# Altium PCB Sonar_board.PcbDoc (part 1 of 2)
Units mm, origin at the board's own origin, x right, y up, seen from the top; angles counter-clockwise.
Board outline 152.4 x 101.6 mm, 4 copper layers (Top Layer, Ground Plane, Power Plane, Bottom Layer), stack 0.462 mm thick; 156 components, 157 nets, 762 pads, 215 vias.
Unrouted connection lines stored in the file: 227.
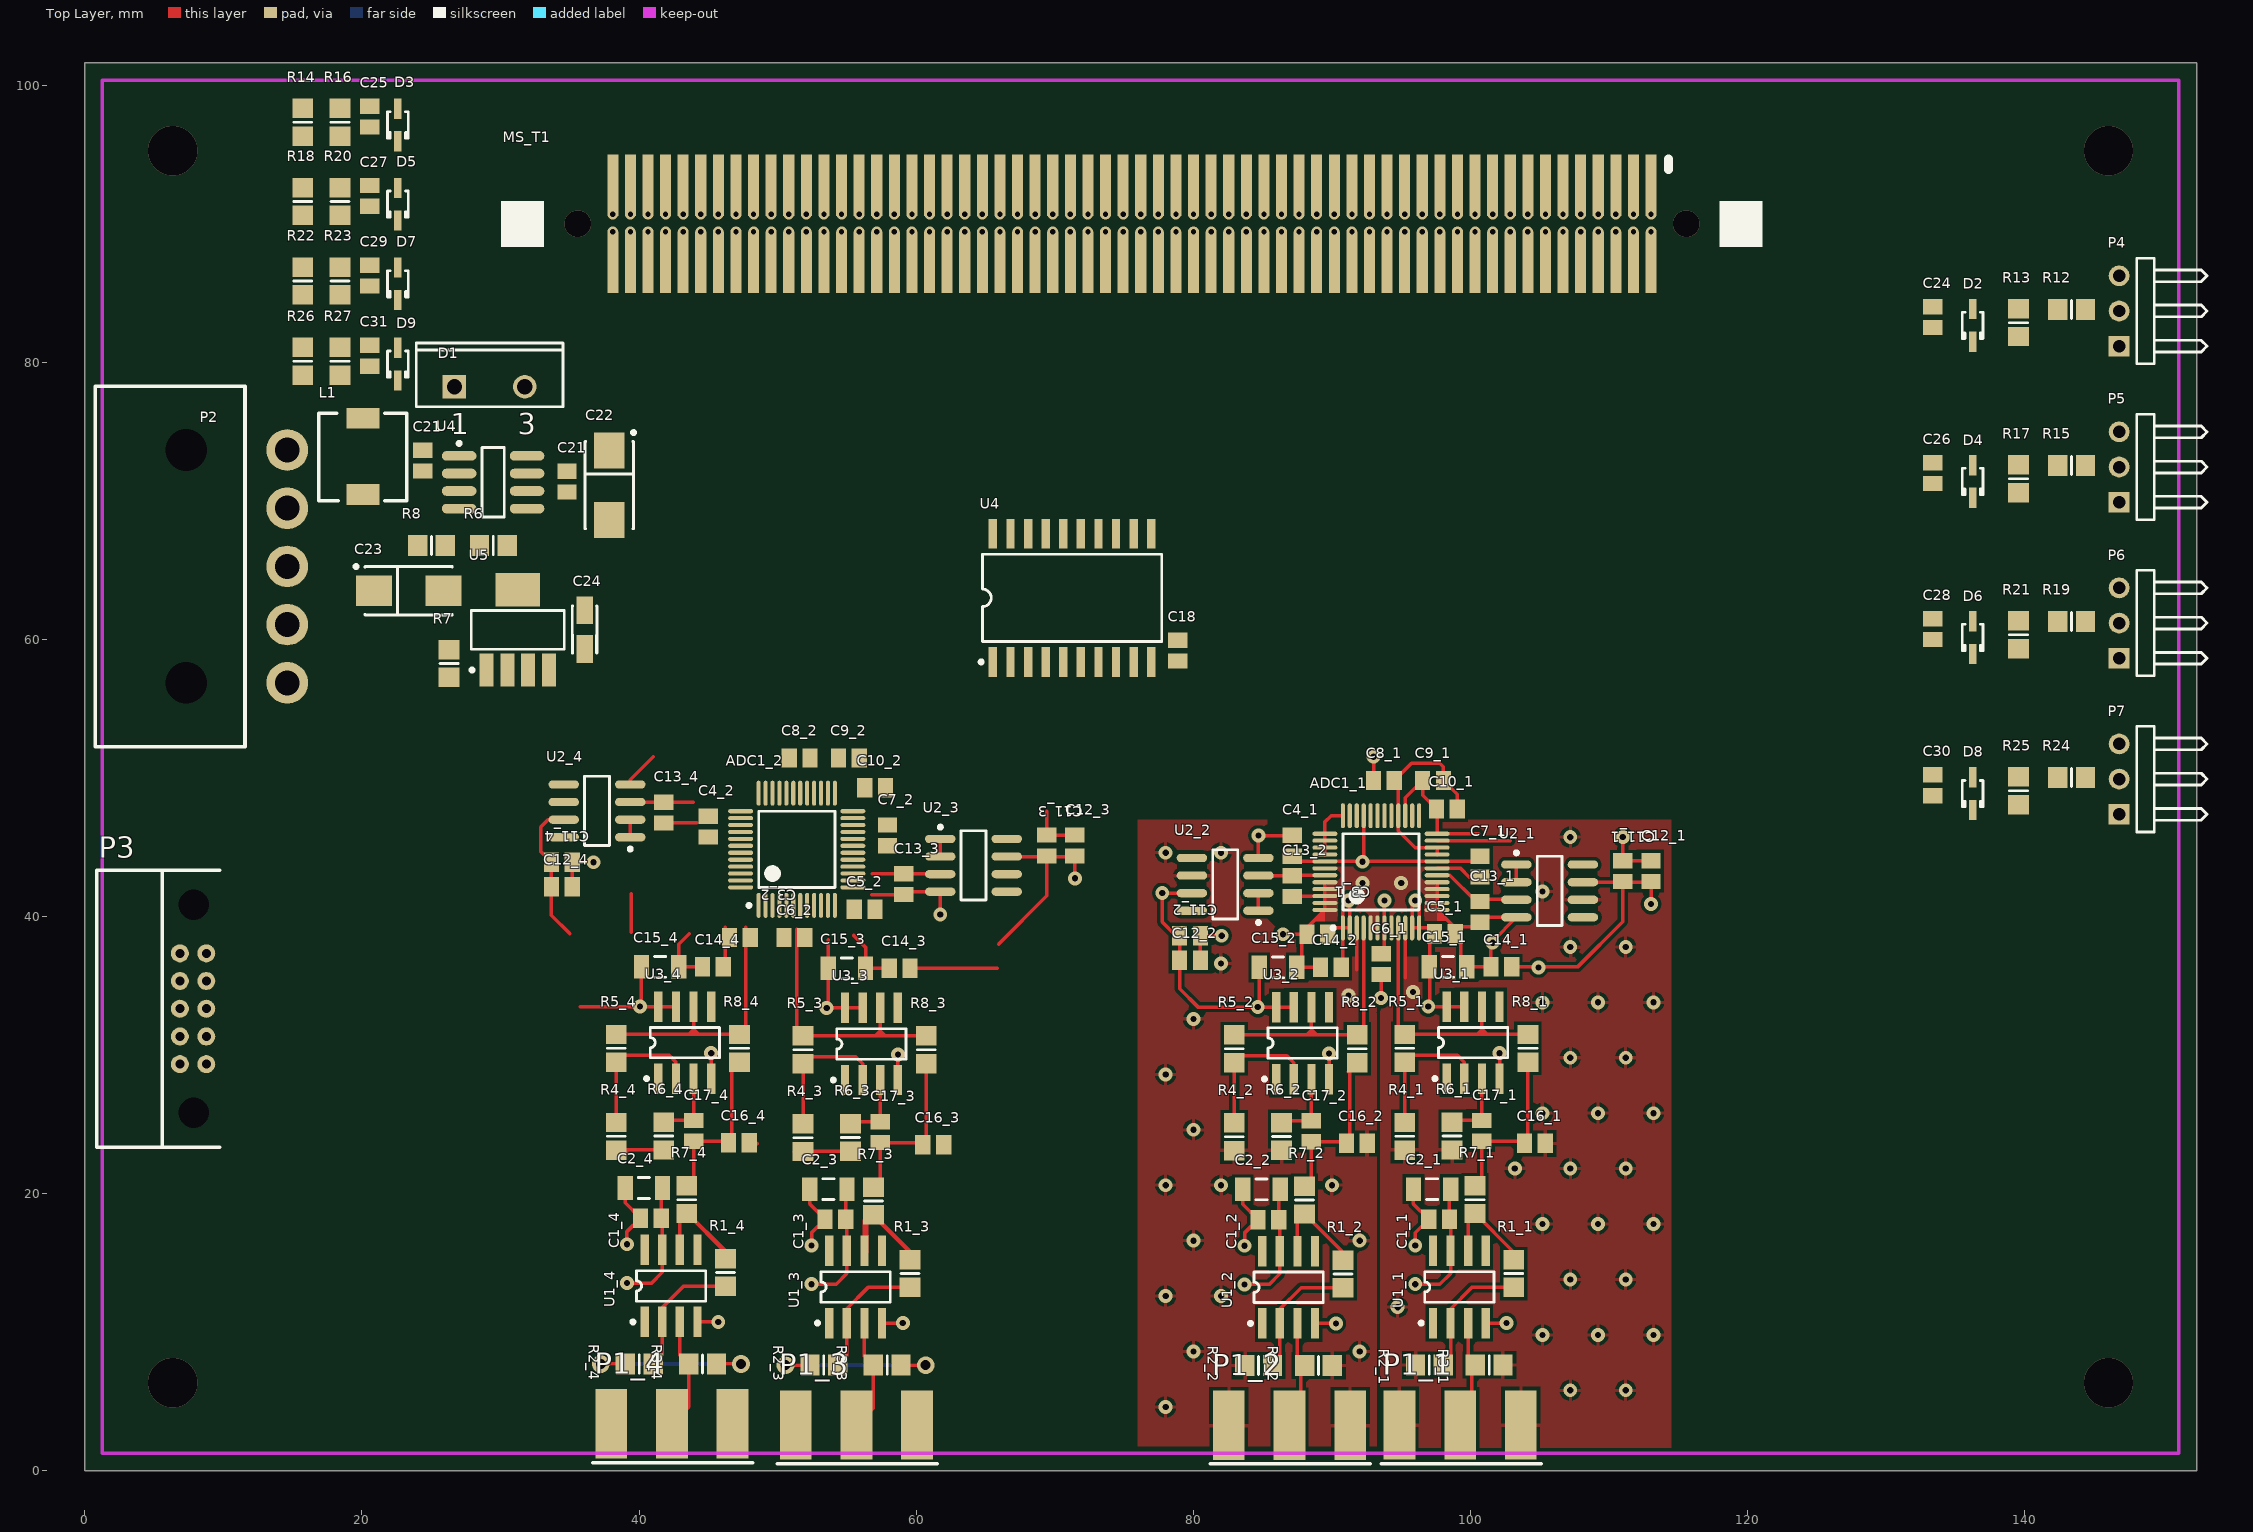
[diagram p0: Top Layer view]
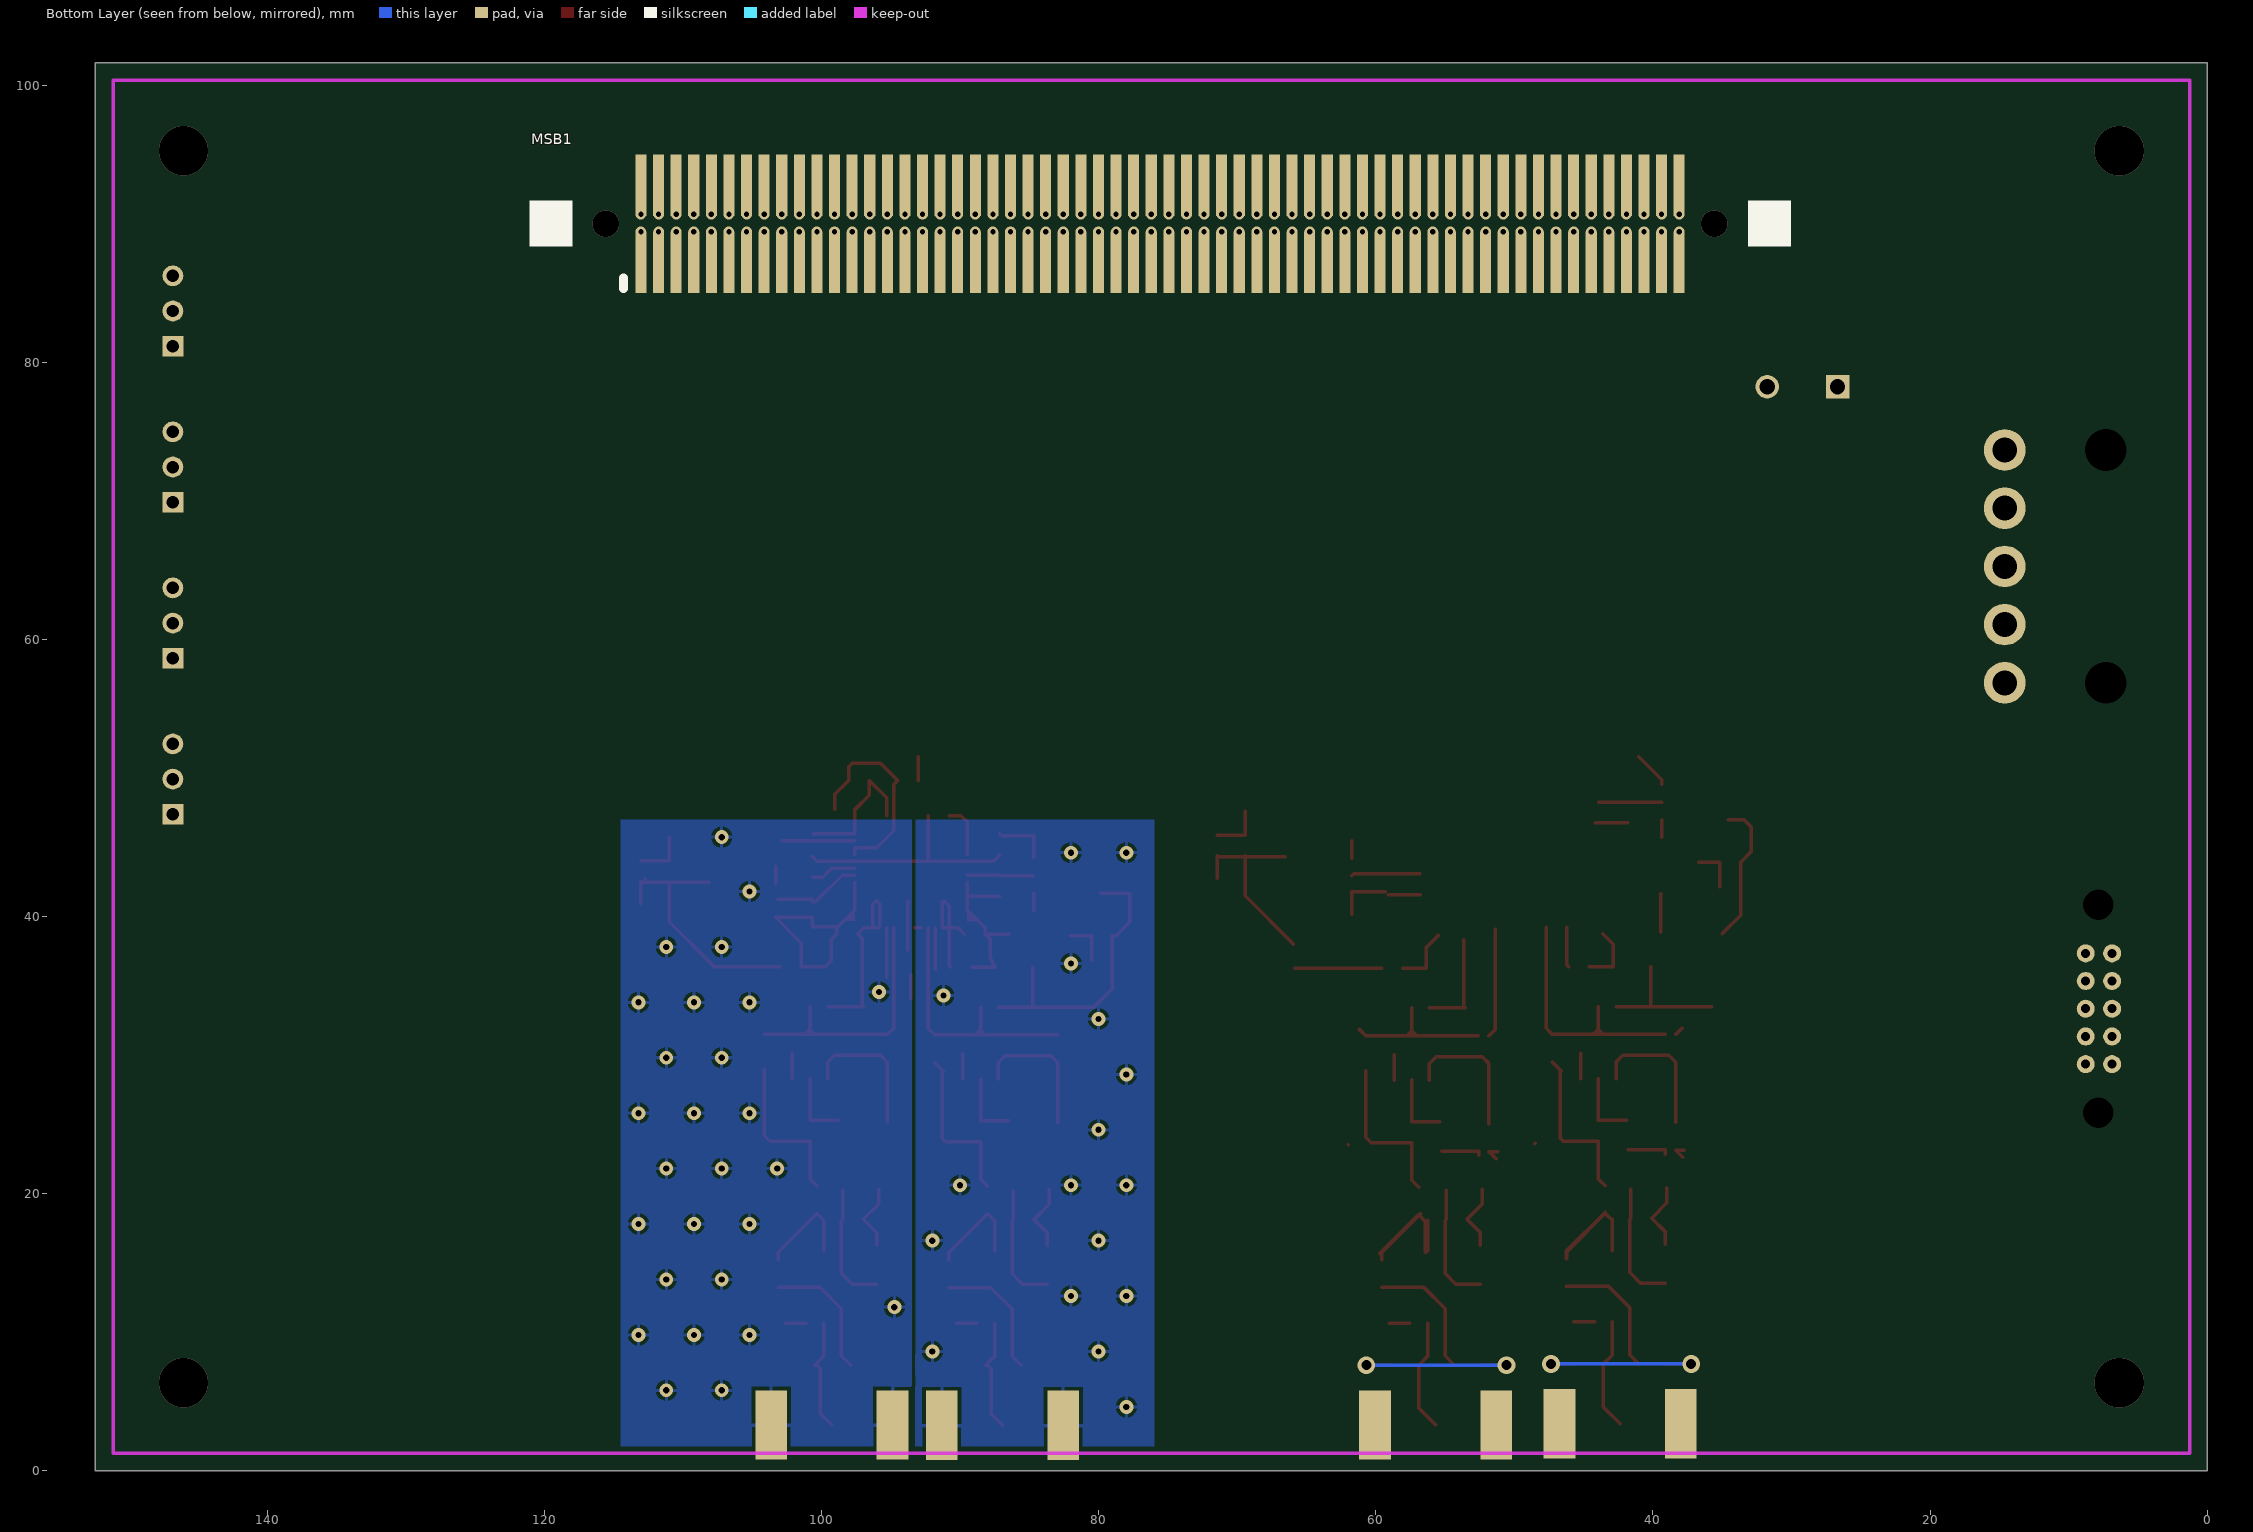
[diagram p1: Bottom Layer view, seen from below]
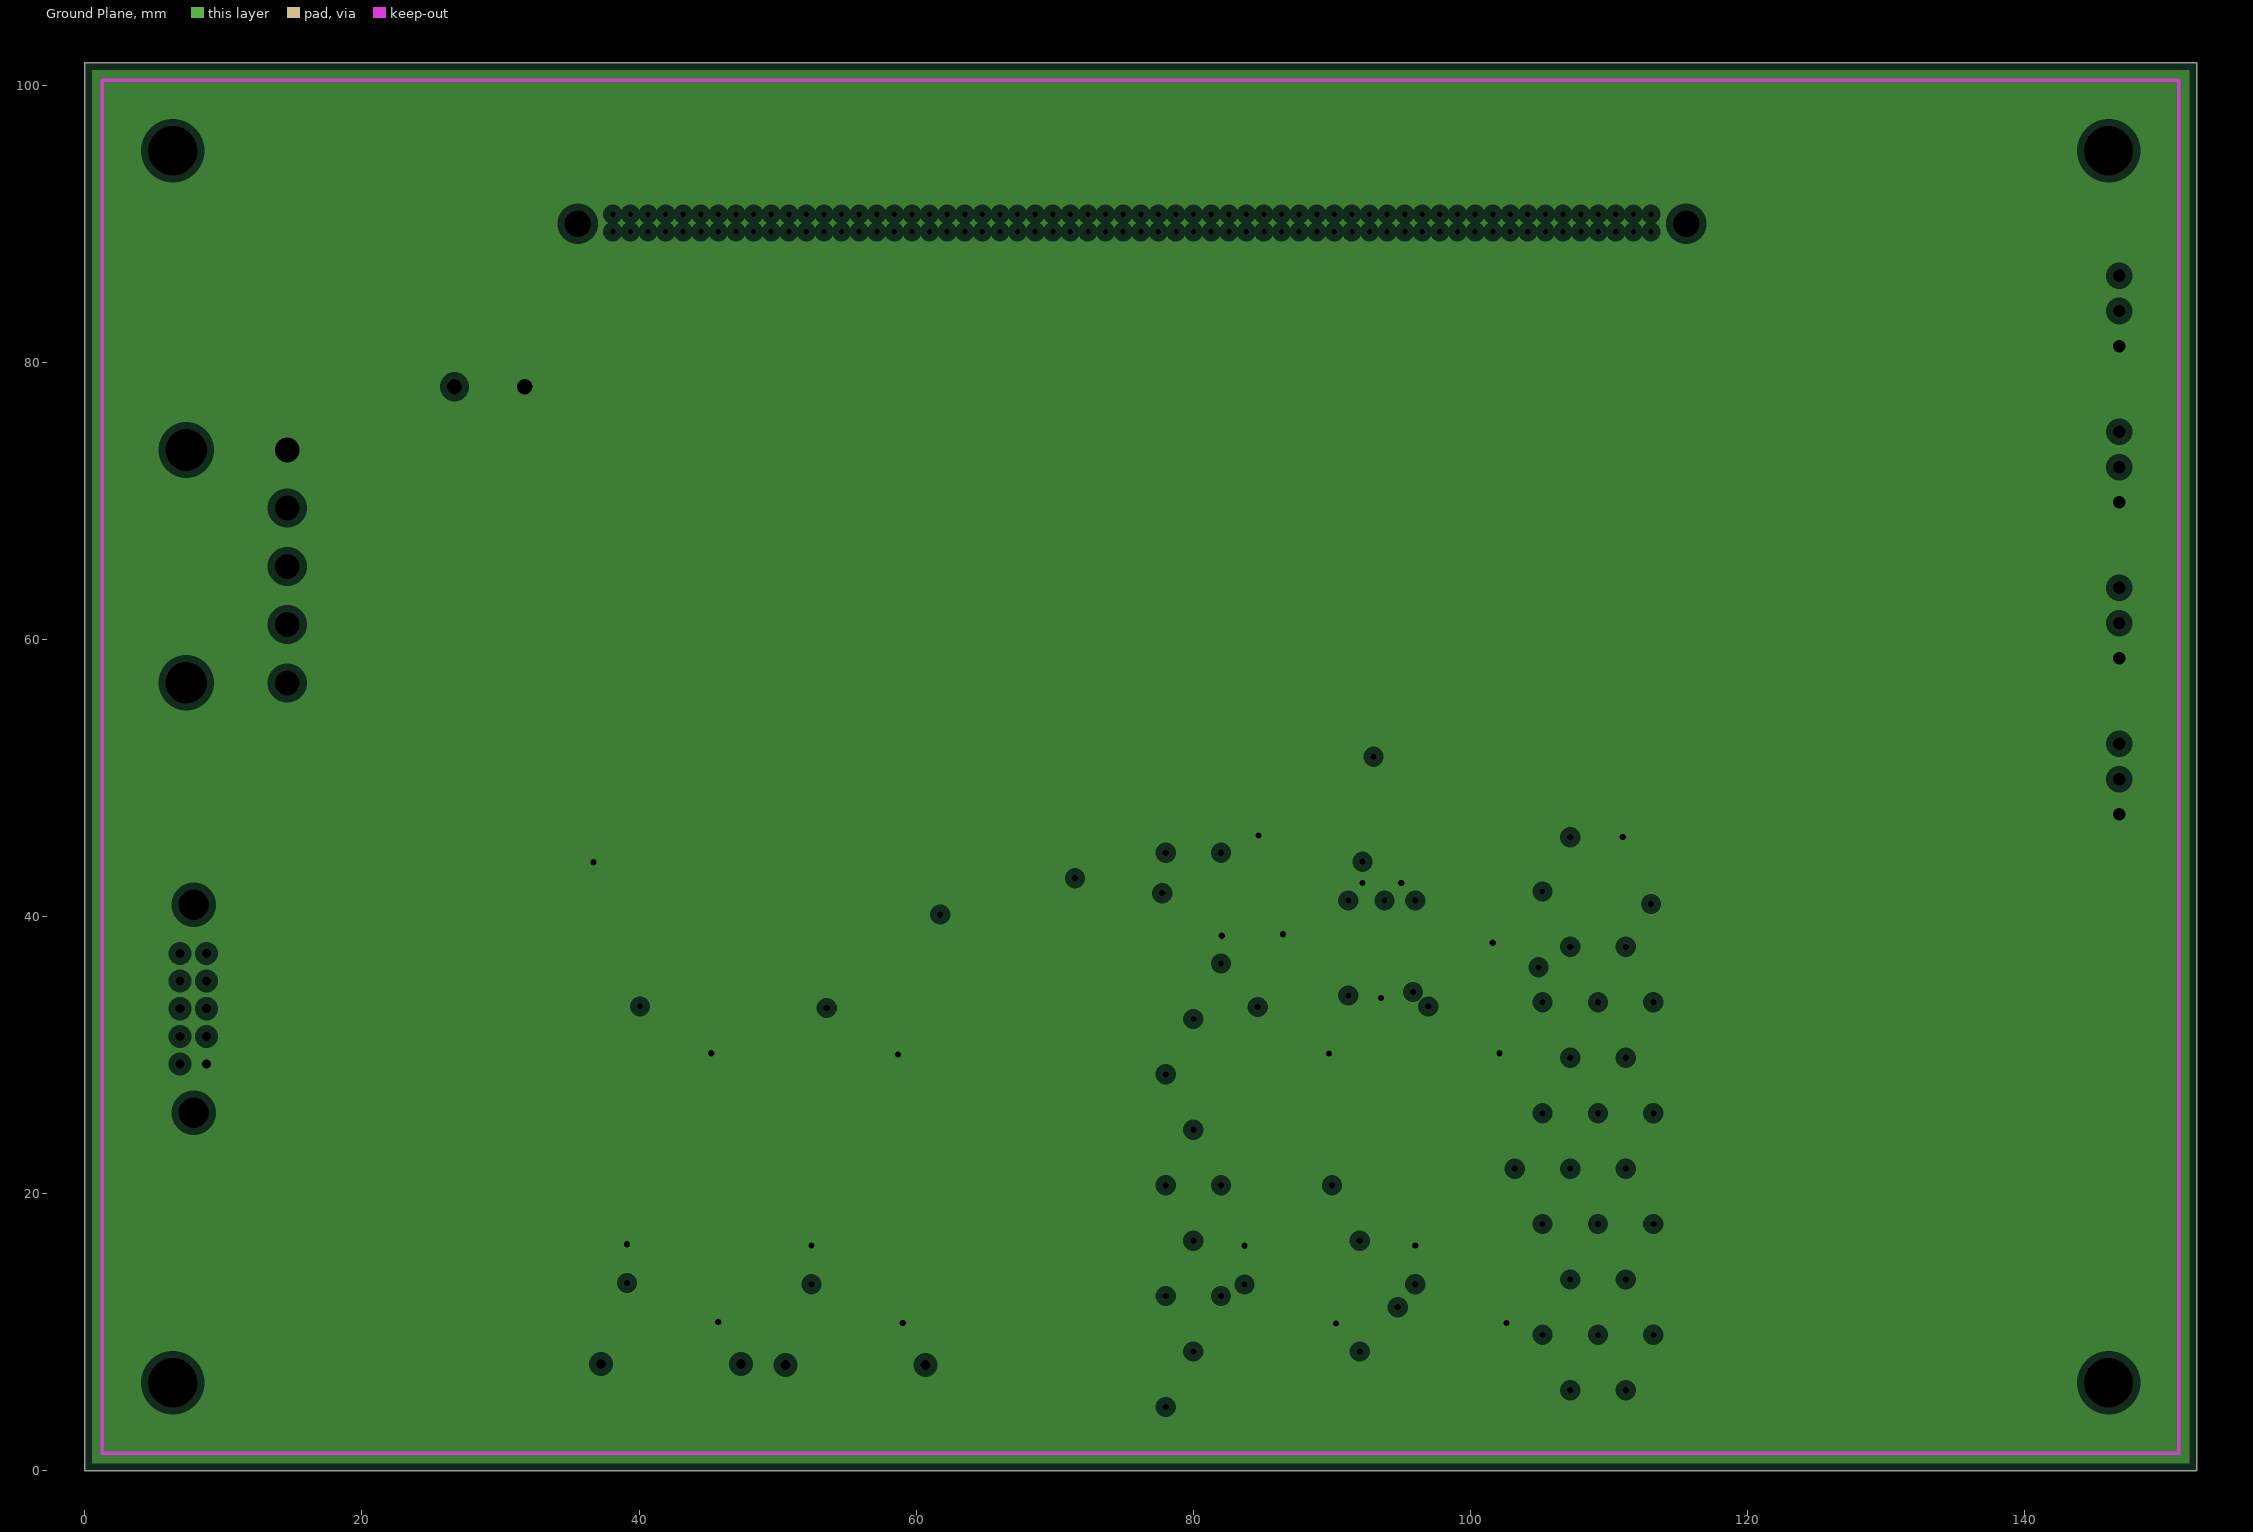
[diagram p2: Ground Plane, clearances drawn from the general rule]
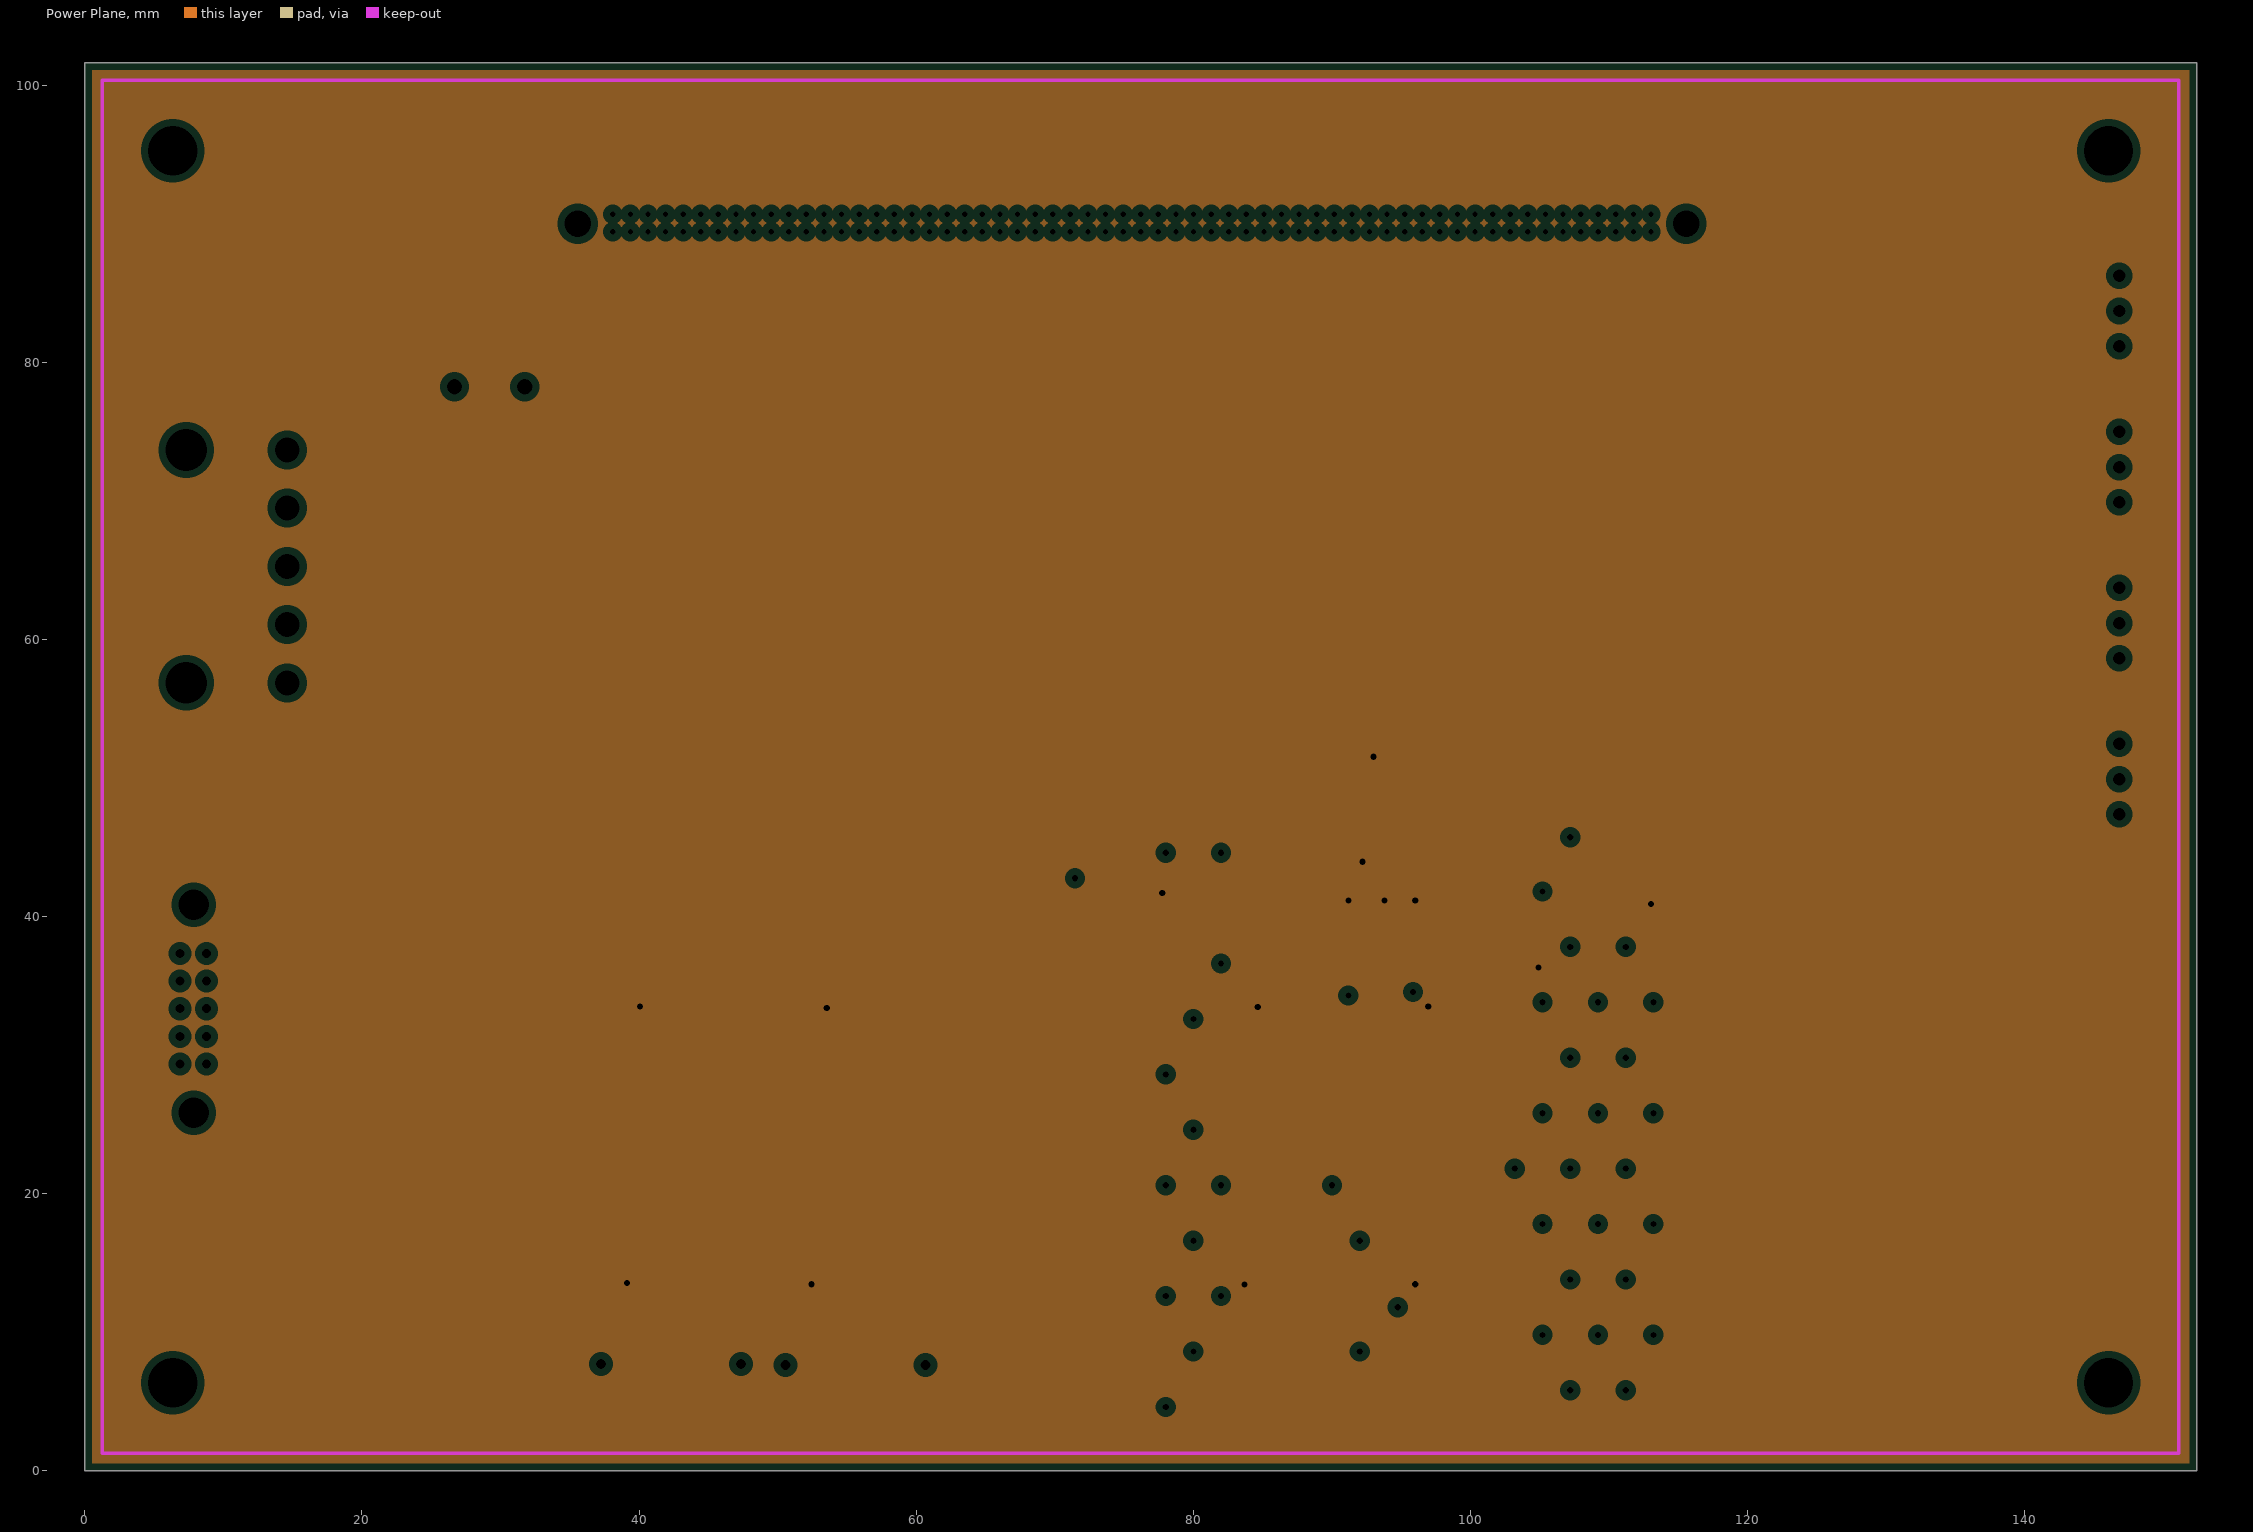
[diagram p3: Power Plane, clearances drawn from the general rule]

## Layer stack, top to bottom
Top Solder: solder mask 0.0102, Solder Resist, Dk 3.5
Top Layer: signal copper 0.0356
Ground Plane: plane copper 0.0356, net GND
Power Plane: plane copper 0.0356, net VCC
Dielectric3: core 0.32, FR-4, Dk 4.8
Bottom Layer: signal copper 0.0356
Bottom Solder: solder mask 0.0102, Solder Resist, Dk 3.5

## Board outline
0,0 152.4,0 152.4,101.6 0,101.6

## Design rules (kind name [scope] priority, off if disabled: settings)
Clearance Clearance_2 [InNamedPolygon('Vref_2')] p1: gap=0.254
Clearance Clearance_1 [InNamedPolygon('ADC_AGND')] p2: gap=0.254
Clearance [Not ((InComponent('ADC1_1') and isPad) or (InComponent('ADC1_2') and isPad)) vs Not ((InComponent('ADC1_1') and isPad) or (InComponent('ADC1_2') and isPad))] p3: gap=0.254
PlaneClearance [All] p1: clearance=0.508
PlaneConnect [All] p1: planeconnectstyle=Relief reliefexpansion=0.508 reliefentries=4 reliefconductorwidth=0.254 reliefairgap=0.254
PolygonConnect PolygonConnect_10 [All vs IsNamedPolygon('Vref_2')] p1: connectstyle=Relief reliefconductorwidth=0.254 reliefentries=4 polygonreliefangle="90 Angle" airgapwidth=0.254
PolygonConnect PolygonConnect_9 [All vs IsNamedPolygon('Vref_2')] p2: connectstyle=Relief reliefconductorwidth=0.254 reliefentries=4 polygonreliefangle="90 Angle" airgapwidth=0.254
PolygonConnect PolygonConnect_8 [All vs IsNamedPolygon('Vref_1')] p3: connectstyle=Relief reliefconductorwidth=0.254 reliefentries=4 polygonreliefangle="90 Angle" airgapwidth=0.254
PolygonConnect PolygonConnect_7 [All vs IsNamedPolygon('Vref_1')] p4: connectstyle=Direct reliefconductorwidth=0.254 reliefentries=4 polygonreliefangle="90 Angle" airgapwidth=0.254
PolygonConnect PolygonConnect_6 [All vs IsNamedPolygon('Vref_2')] p5: connectstyle=Direct reliefconductorwidth=0.254 reliefentries=4 polygonreliefangle="90 Angle" airgapwidth=0.254
PolygonConnect PolygonConnect_5 [All vs IsNamedPolygon('Vref_2')] p6: connectstyle=Direct reliefconductorwidth=0.254 reliefentries=4 polygonreliefangle="90 Angle" airgapwidth=0.254
PolygonConnect PolygonConnect_4 [All vs IsNamedPolygon('Vref_2')] p7: connectstyle=Direct reliefconductorwidth=0.254 reliefentries=4 polygonreliefangle="90 Angle" airgapwidth=0.254
PolygonConnect PolygonConnect_3 [All vs IsNamedPolygon('Vref_1')] p8: connectstyle=Relief reliefconductorwidth=0.254 reliefentries=4 polygonreliefangle="90 Angle" airgapwidth=0.254
PolygonConnect PolygonConnect_2 [All vs IsNamedPolygon('Vref_1')] p9: connectstyle=Direct reliefconductorwidth=0.254 reliefentries=4 polygonreliefangle="90 Angle" airgapwidth=0.254
PolygonConnect PolygonConnect_1 [All vs IsNamedPolygon('ADC_AGND')] p10: connectstyle=Direct reliefconductorwidth=0.254 reliefentries=4 polygonreliefangle="90 Angle" airgapwidth=0.254
PolygonConnect [All] p11: connectstyle=Relief reliefconductorwidth=0.254 reliefentries=4 polygonreliefangle="90 Angle" airgapwidth=0.254
RoomDefinition Biasing_circuitry1 [InComponentClass('Biasing_circuitry1')] p1: confinementstyle=ConfineIn formatcopy=TRUE lockcomponents=FALSE outline 99.568,45.72 114.2,45.72 114.2,38.1 99.568,38.1
RoomDefinition PairB [InComponentClass('Room Definition 2')] p2: confinementstyle=ConfineIn formatcopy=TRUE lockcomponents=FALSE outline 30.988,0 73.152,0 73.152,52.578 30.988,52.578
RoomDefinition PairA [InComponentClass('Room Definition 1')] p3: confinementstyle=ConfineIn formatcopy=TRUE lockcomponents=FALSE outline 74.422,0 117.602,0 117.602,53.086 74.422,53.086
RoomDefinition ADC_power [InComponentClass('ADC_power')] p4: confinementstyle=ConfineIn formatcopy=TRUE lockcomponents=FALSE outline 16.129,53.086 43.18,53.086 43.18,81.534 16.129,81.534
RoomDefinition Biasing_circuitry3 [InComponentClass('Biasing_circuitry3')] p5: confinementstyle=ConfineIn formatcopy=TRUE lockcomponents=FALSE outline 57.785,47.371 72.771,47.371 72.771,39.751 57.785,39.751
RoomDefinition Biasing_circuitry2 [InComponentClass('Biasing_circuitry2')] p6: confinementstyle=ConfineIn formatcopy=TRUE lockcomponents=FALSE outline 77.216,46.482 88.138,46.482 88.138,34.29 77.216,34.29
RoomDefinition Biasing_circuitry4 [InComponentClass('Biasing_circuitry4')] p7: confinementstyle=ConfineIn formatcopy=TRUE lockcomponents=FALSE outline 31.877,51.784 42.799,51.784 42.799,39.592 31.877,39.592
RoomDefinition Sallen_key_bandpass3 [InComponentClass('Sallen_key_bandpass3')] p8: confinementstyle=ConfineIn formatcopy=TRUE lockcomponents=FALSE outline 49.911,39.271 64.274,39.271 64.274,16.411 49.911,16.411
RoomDefinition Sallen_key_bandpass4 [InComponentClass('Sallen_key_bandpass4')] p9: confinementstyle=ConfineIn formatcopy=TRUE lockcomponents=FALSE outline 36.437,39.37 50.8,39.37 50.8,16.51 36.437,16.51
RoomDefinition Single_channel_VMA3 [InComponentClass('Single_channel_VMA3')] p10: confinementstyle=ConfineIn formatcopy=TRUE lockcomponents=FALSE outline 63.881,0.127 49.647,0.127 49.647,22.307 63.881,22.307
RoomDefinition Single_channel_VMA4 [InComponentClass('Single_channel_VMA4')] p11: confinementstyle=ConfineIn formatcopy=TRUE lockcomponents=FALSE outline 50.562,0.207 36.328,0.207 36.328,22.387 50.562,22.387
RoomDefinition Sallen_key_bandpass1 [InComponentClass('Sallen_key_bandpass1')] p12: confinementstyle=ConfineIn formatcopy=TRUE lockcomponents=FALSE outline 93.333,39.37 107.696,39.37 107.696,16.51 93.333,16.51
RoomDefinition Sallen_key_bandpass2 [InComponentClass('Sallen_key_bandpass2')] p13: confinementstyle=ConfineIn formatcopy=TRUE lockcomponents=FALSE outline 81.026,39.338 95.389,39.338 95.389,16.478 81.026,16.478
RoomDefinition Single_channel_VMA1 [InComponentClass('Single_channel_VMA1')] p14: confinementstyle=ConfineIn formatcopy=TRUE lockcomponents=FALSE outline 107.452,0.127 93.218,0.127 93.218,22.307 107.452,22.307
RoomDefinition Single_channel_VMA2 [InComponentClass('Single_channel_VMA2')] p15: confinementstyle=ConfineIn formatcopy=TRUE lockcomponents=FALSE outline 95.133,0.102 80.899,0.102 80.899,22.282 95.133,22.282
RoutingVias ThruVia [((StartLayer = 'Top Layer') and (StopLayer = 'Bottom Layer'))] p1: holewidth=0.61 width=1.27 viastyle="Through Hole" minholewidth=0.711 minwidth=1.27 maxholewidth=0.711 maxwidth=1.27
RoutingVias MicroVia [not ((StartLayer = 'Top Layer') and (StopLayer = 'Bottom Layer'))] p2: holewidth=0.356 width=0.762 viastyle="Through Hole" minholewidth=0.305 minwidth=0.66 maxholewidth=0.61 maxwidth=1.067
SolderMaskExpansion [All] p1: expansion=0.102
UnpouredPolygon [All] p1: allowunpoured=FALSE
Width [All] p1: maxlimit=0.254 minlimit=0.254 preferedwidth=0.254
27 further rules are at their usual default settings.

## Classes and differential pairs
component class "Room Definition 2": ADC1_2 C1_3 C1_4 C2_3 C2_4 C3_2 C4_2 C5_2 C6_2 C7_2 C8_2 C9_2 C10_2 C11_3 C11_4 C12_3 C12_4 C13_3 C13_4 C14_3 C14_4 C15_3 C15_4 C16_3 C16_4 C17_3 C17_4 P1_3 P1_4 R1_3 R1_4 R2_3 R2_4 R3_3 R3_4 R4_3 R4_4 R5_3 R5_4 R6_3 R6_4 R7_3 R7_4 R8_3 R8_4 U1_3 U1_4 U2_3 U2_4 U3_3 U3_4
component class "Room Definition 1": ADC1_1 C1_1 C1_2 C2_1 C2_2 C3_1 C4_1 C5_1 C6_1 C7_1 C8_1 C9_1 C10_1 C11_1 C11_2 C12_1 C12_2 C13_1 C13_2 C14_1 C14_2 C15_1 C15_2 C16_1 C16_2 C17_1 C17_2 P1_1 P1_2 R1_1 R1_2 R2_1 R2_2 R3_1 R3_2 R4_1 R4_2 R5_1 R5_2 R6_1 R6_2 R7_1 R7_2 R8_1 R8_2 U1_1 U1_2 U2_1 U2_2 U3_1 U3_2
component class Sallen_key_bandpass3: C14_3 C15_3 C16_3 C17_3 R4_3 R5_3 R6_3 R7_3 R8_3 U3_3
component class Single_channel_VMA4: C1_4 C2_4 P1_4 R1_4 R2_4 R3_4 U1_4
component class Single_channel_VMA3: C1_3 C2_3 P1_3 R1_3 R2_3 R3_3 U1_3
component class Single_channel_VMA2: C1_2 C2_2 P1_2 R1_2 R2_2 R3_2 U1_2
component class Single_channel_VMA1: C1_1 C2_1 P1_1 R1_1 R2_1 R3_1 U1_1
component class Sallen_key_bandpass4: C14_4 C15_4 C16_4 C17_4 R4_4 R5_4 R6_4 R7_4 R8_4 U3_4
component class Sallen_key_bandpass2: C14_2 C15_2 C16_2 C17_2 R4_2 R5_2 R6_2 R7_2 R8_2 U3_2
component class Sallen_key_bandpass1: C14_1 C15_1 C16_1 C17_1 R4_1 R5_1 R6_1 R7_1 R8_1 U3_1
component class Biasing_circuitry4: C11_4 C12_4 C13_4 U2_4
component class Biasing_circuitry3: C11_3 C12_3 C13_3 U2_3
component class Biasing_circuitry2: C11_2 C12_2 C13_2 U2_2
component class Biasing_circuitry1: C11_1 C12_1 C13_1 U2_1
component class ADC_power: C21 C22 C23 C24 D1 L1 R6 R7 R8 U4 U5
component class Pair_A: ADC1_1 C3_1 C4_1 C5_1 C6_1 C7_1 C8_1 C9_1 C10_1
component class Pair_B: ADC1_2 C3_2 C4_2 C5_2 C6_2 C7_2 C8_2 C9_2 C10_2
component class sonar_board_rev_2013A: P2
component class sonar_extras: C24 C25 C26 C27 C28 C29 C30 C31 D2 D3 D4 D5 D6 D7 D8 D9 P3 P4 P5 P6 P7 R12 R13 R14 R15 R16 R17 R18 R19 R20 R21 R22 R23 R24 R25 R26 R27
component class Stack_breakout: C18 MS1 MS2 MS_T1 MSB1 U4
channel class prototype_dual_channel: Biasing_circuitry1 Biasing_circuitry2 Biasing_circuitry3 Biasing_circuitry4 Pair_A Pair_B Sallen_key_bandpass1 Sallen_key_bandpass2 Sallen_key_bandpass3 Sallen_key_bandpass4 Single_channel_VMA1 Single_channel_VMA2 Single_channel_VMA3 Single_channel_VMA4

## Components (designator, comment, footprint, x,y, rotation, side; value= is the part's Value field where it differs from the comment)
ADC1_1 "AD7264" TSQFP50P900X900-48N 93.541,43.218 r90 top (schematic designator ADC1)
ADC1_2 "AD7264" TSQFP50P900X900-48N 51.377,44.845 r90 top (schematic designator ADC1)
C1_1 "Cap Semi" C0805 97.733,18.148 r0 top (schematic designator C1)
C1_2 "Cap Semi" C0805 85.414,18.123 r0 top (schematic designator C1)
C1_3 "Cap Semi" C0805 54.162,18.148 r0 top (schematic designator C1)
C1_4 "Cap Semi" C0805 40.843,18.228 r0 top (schematic designator C1)
C2_1 "Cap Semi" C1206 97.231,20.32 r0 top (schematic designator C2)
C2_2 "Cap Semi" C1206 84.912,20.295 r0 top (schematic designator C2)
C2_3 "Cap Semi" C1206 53.66,20.32 r0 top (schematic designator C2)
C2_4 "Cap Semi" C1206 40.341,20.4 r0 top (schematic designator C2)
C3_1 "Cap Semi" C0805 88.946,38.712 r0 top (schematic designator C3)
C3_2 "Cap Semi" C0805 47.269,38.481 r0 top (schematic designator C3)
C4_1 "Cap Semi" C0805 87.122,45.1 r270 top (schematic designator C4)
C4_2 "Cap Semi" C0805 44.983,46.482 r270 top (schematic designator C4)
C5_1 "Cap Semi" C0805 98.146,38.735 r180 top (schematic designator C5)
C5_2 "Cap Semi" C0805 56.274,40.513 r180 top (schematic designator C5)
C6_1 "Cap Semi" C0805 93.548,36.556 r90 top (schematic designator C6)
C6_2 "Cap Semi" C0805 51.206,38.481 r0 top (schematic designator C6)
C7_1 "Cap Semi" C0805 100.684,43.588 r90 top (schematic designator C7)
C7_2 "Cap Semi" C0805 57.925,45.847 r270 top (schematic designator C7)
C8_1 "Cap Semi" C0805 93.751,49.808 r180 top (schematic designator C8)
C8_2 "Cap Semi" C0805 51.587,51.435 r180 top (schematic designator C8)
C9_1 "Cap Semi" C0805 97.295,49.808 r180 top (schematic designator C9)
C9_2 "Cap Semi" C0805 55.131,51.435 r180 top (schematic designator C9)
C10_1 "Cap Semi" C0805 98.298,47.752 r180 top (schematic designator C10)
C10_2 "Cap Semi" C0805 57.036,49.276 r180 top (schematic designator C10)
C11_1 "Cap Semi" C0805 110.996,43.266 r270 top (schematic designator C11)
C11_2 "Cap Semi" C0805 79.756,38.608 r180 top (schematic designator C11)
C11_3 "Cap Semi" C0805 69.419,45.117 r270 top (schematic designator C11)
C11_4 "Cap Semi" C0805 34.417,43.91 r180 top (schematic designator C11)
C12_1 "Cap Semi" C0805 113.028,43.266 r270 top (schematic designator C12)
C12_2 "Cap Semi" C0805 79.756,36.83 r180 top (schematic designator C12)
C12_3 "Cap Semi" C0805 71.451,45.117 r270 top (schematic designator C12)
C12_4 "Cap Semi" C0805 34.417,42.132 r180 top (schematic designator C12)
C13_1 "Cap Semi" C0805 100.683,40.325 r90 top (schematic designator C13)
C13_2 "Cap Semi" C0805 87.122,42.189 r90 top (schematic designator C13)
C13_3 "Cap Semi" C0805 59.106,42.323 r90 top (schematic designator C13)
C13_4 "Cap Semi" C0805 41.783,47.491 r90 top (schematic designator C13)
C14_1 "Cap Semi" C0805 102.223,36.354 r0 top (schematic designator C14)
C14_2 "Cap Semi" C0805 89.916,36.322 r0 top (schematic designator C14)
C14_3 "Cap Semi" C0805 58.801,36.255 r0 top (schematic designator C14)
C14_4 "Cap Semi" C0805 45.327,36.354 r0 top (schematic designator C14)
C15_1 "Cap Semi" C1206 98.38,36.354 r180 top (schematic designator C15)
C15_2 "Cap Semi" C1206 86.106,36.322 r180 top (schematic designator C15)
C15_3 "Cap Semi" C1206 54.991,36.255 r180 top (schematic designator C15)
C15_4 "Cap Semi" C1206 41.517,36.354 r180 top (schematic designator C15)
C16_1 "Cap Semi" C0805 104.648,23.622 r0 top (schematic designator C16)
C16_2 "Cap Semi" C0805 91.794,23.622 r0 top (schematic designator C16)
C16_3 "Cap Semi" C0805 61.226,23.523 r0 top (schematic designator C16)
C16_4 "Cap Semi" C0805 47.205,23.654 r0 top (schematic designator C16)
C17_1 "Cap Semi" C0805 100.826,24.527 r270 top (schematic designator C17)
C17_2 "Cap Semi" C0805 88.519,24.495 r270 top (schematic designator C17)
C17_3 "Cap Semi" C0805 57.404,24.428 r270 top (schematic designator C17)
C17_4 "Cap Semi" C0805 43.93,24.527 r270 top (schematic designator C17)
C18 "Cap Semi" C0805 78.867,59.182 r90 top
C21 "Cap Semi" C0805 34.798,71.374 r90 top
C21 "Cap Semi" C0805 24.384,72.898 r90 top
C22 "Cap Pol3" TC6032-2412 37.846,71.12 r270 top
C23 "Cap Pol3" TC6032-2412 23.368,63.5 r0 top
C24 "Cap Pol3" TC3216-1206 36.068,60.706 r90 top
C24 "Cap Semi" C0805 133.36,83.249 r90 top
C25 "Cap Semi" C0805 20.551,97.717 r90 top
C26 "Cap Semi" C0805 133.36,71.989 r90 top
C27 "Cap Semi" C0805 20.551,92.002 r90 top
C28 "Cap Semi" C0805 133.36,60.728 r90 top
C29 "Cap Semi" C0805 20.551,86.252 r90 top
C30 "Cap Semi" C0805 133.36,49.467 r90 top
C31 "Cap Semi" C0805 20.551,80.464 r90 top
D1 "Shottkey" TO-220AC 29.21,78.232 r0 top
D2 "D Zener" SOD-323 136.234,82.649 r270 top
D3 "D Zener" SOD-323 22.583,97.117 r270 top
D4 "D Zener" SOD-323 136.234,71.389 r270 top
D5 "D Zener" SOD-323 22.583,91.402 r270 top
D6 "D Zener" SOD-323 136.234,60.128 r270 top
D7 "D Zener" SOD-323 22.583,85.652 r270 top
D8 "D Zener" SOD-323 136.234,48.867 r270 top
D9 "D Zener" SOD-323 22.583,79.864 r270 top
L1 "Inductor" SB_IND 20.066,75.946 r270 top
MS_T1 "120P_SMD_CONN_FEM" FX2-120P-1.27SV 113.03,92.763 r270 top
MSB1 "120P_SMD_CONN_FEM" FX2-120P-1.27SV 113.03,87.213 r90 bottom
P1_1 "SMB" SMA_SMT 99.257,3.302 r0 top (schematic designator P1)
P1_2 "SMB" SMA_SMT 86.938,3.277 r0 top (schematic designator P1)
P1_3 "SMB" SMA_SMT 55.686,3.302 r0 top (schematic designator P1)
P1_4 "SMB" SMA_SMT 42.367,3.382 r0 top (schematic designator P1)
P2 "Header 5H" Molex_Minifit_JR_5CKT 14.605,73.66 r270 top
P3 "Header 10" Harwin_IMU_recp 6.858,29.337 r90 top
P4 "Header 3H" HDR1X3H 146.812,81.153 r90 top
P5 "Header 3H" HDR1X3H 146.812,69.892 r90 top
P6 "Header 3H" HDR1X3H 146.812,58.632 r90 top
P7 "Header 3H" HDR1X3H 146.812,47.371 r90 top
R1_1 "Res Semi" 6-0805_M 103.124,14.224 r90 top (schematic designator R1)
R1_2 "Res Semi" 6-0805_M 90.805,14.199 r90 top (schematic designator R1)
R1_3 "Res Semi" 6-0805_M 59.553,14.224 r90 top (schematic designator R1)
R1_4 "Res Semi" 6-0805_M 46.234,14.304 r90 top (schematic designator R1)
R2_1 "Res Semi" 6-0805_M 97.028,7.62 r0 top (schematic designator R2)
R2_2 "Res Semi" 6-0805_M 84.709,7.595 r0 top (schematic designator R2)
R2_3 "Res Semi" 6-0805_M 53.33,7.62 r0 top (schematic designator R2)
R2_4 "Res Semi" 6-0805_M 40.011,7.7 r0 top (schematic designator R2)
R3_1 "Res Semi" 6-0805_M 101.346,7.62 r0 top (schematic designator R3)
R3_2 "Res Semi" 6-0805_M 89.027,7.595 r0 top (schematic designator R3)
R3_3 "Res Semi" 6-0805_M 57.902,7.62 r0 top (schematic designator R3)
R3_4 "Res Semi" 6-0805_M 44.583,7.7 r0 top (schematic designator R3)
R4_1 "Res Semi" 6-0805_M 95.25,24.13 r90 top (schematic designator R4)
R4_2 "Res Semi" 6-0805_M 82.943,24.098 r90 top (schematic designator R4)
R4_3 "Res Semi" 6-0805_M 51.828,24.031 r90 top (schematic designator R4)
R4_4 "Res Semi" 6-0805_M 38.354,24.13 r90 top (schematic designator R4)
R5_1 "Res Semi" 6-0805_M 95.25,30.48 r90 top (schematic designator R5)
R5_2 "Res Semi" 6-0805_M 82.943,30.448 r90 top (schematic designator R5)
R5_3 "Res Semi" 6-0805_M 51.828,30.381 r90 top (schematic designator R5)
R5_4 "Res Semi" 6-0805_M 38.354,30.48 r90 top (schematic designator R5)
R6 "Res Semi" 6-0805_M 29.48,66.762 r0 top
R6_1 "Res Semi" 6-0805_M 98.667,24.146 r270 top (schematic designator R6)
R6_2 "Res Semi" 6-0805_M 86.36,24.114 r270 top (schematic designator R6)
R6_3 "Res Semi" 6-0805_M 55.245,24.047 r270 top (schematic designator R6)
R6_4 "Res Semi" 6-0805_M 41.771,24.146 r270 top (schematic designator R6)
R7 "Res Semi" 6-0805_M 26.289,58.253 r90 top
R7_1 "Res Semi" 6-0805_M 100.33,19.558 r90 top (schematic designator R7)
R7_2 "Res Semi" 6-0805_M 88.023,19.526 r90 top (schematic designator R7)
R7_3 "Res Semi" 6-0805_M 56.908,19.459 r90 top (schematic designator R7)
R7_4 "Res Semi" 6-0805_M 43.434,19.558 r90 top (schematic designator R7)
R8 "Res Semi" 6-0805_M 25.019,66.762 r0 top
R8_1 "Res Semi" 6-0805_M 104.14,30.48 r90 top (schematic designator R8)
R8_2 "Res Semi" 6-0805_M 91.833,30.448 r90 top (schematic designator R8)
R8_3 "Res Semi" 6-0805_M 60.718,30.381 r90 top (schematic designator R8)
R8_4 "Res Semi" 6-0805_M 47.244,30.48 r90 top (schematic designator R8)
R12 "Res Semi" 6-0805_M 143.383,83.799 r180 top
R13 "Res Semi" 6-0805_M 139.559,82.849 r90 top
R14 "Res Semi" 6-0805_M 15.725,97.317 r90 top
R15 "Res Semi" 6-0805_M 143.383,72.539 r180 top
R16 "Res Semi" 6-0805_M 18.415,97.317 r90 top
R17 "Res Semi" 6-0805_M 139.559,71.589 r90 top
R18 "Res Semi" 6-0805_M 15.725,91.602 r90 top
R19 "Res Semi" 6-0805_M 143.383,61.278 r180 top
R20 "Res Semi" 6-0805_M 18.415,91.602 r90 top
R21 "Res Semi" 6-0805_M 139.559,60.328 r90 top
R22 "Res Semi" 6-0805_M 15.725,85.852 r90 top
R23 "Res Semi" 6-0805_M 18.415,85.852 r90 top
R24 "Res Semi" 6-0805_M 143.383,50.017 r180 top
R25 "Res Semi" 6-0805_M 139.559,49.067 r90 top
R26 "Res Semi" 6-0805_M 15.725,80.064 r90 top
R27 "Res Semi" 6-0805_M 18.415,80.064 r90 top
U1_1 "OP184ES" SO-8 99.197,13.255 r0 top (schematic designator U1)
U1_2 "OP184ES" SO-8 86.878,13.23 r0 top (schematic designator U1)
U1_3 "OP184ES" SO-8 55.626,13.255 r0 top (schematic designator U1)
U1_4 "OP184ES" SO-8 42.307,13.335 r0 top (schematic designator U1)
U2_1 "ADA4899" SO8_N 105.712,41.837 r0 top (schematic designator U2)
U2_2 "ADA4899" SO8_N 82.296,42.316 r180 top (schematic designator U2)
U2_3 "ADA4899" SO8_N 64.135,43.688 r0 top (schematic designator U2)
U2_4 "ADA4899" SO8_N 36.957,47.618 r180 top (schematic designator U2)
U3_1 "OP184ES" SO-8 100.191,30.893 r0 top (schematic designator U3)
U3_2 "OP184ES" SO-8 87.884,30.861 r0 top (schematic designator U3)
U3_3 "OP184ES" SO-8 56.769,30.794 r0 top (schematic designator U3)
U3_4 "OP184ES" SO-8 43.295,30.893 r0 top (schematic designator U3)
U4 "TPS5420" SO8_M 29.464,71.334 r0 top
U4 "SN74BCT541DW" DW020 71.247,62.992 r0 top
U5 "LP3852" SOT223-5N 31.242,60.682 r90 top

## Footprints (in the part's own frame and the unit in brackets; to place one, negate y for a bottom-side part, rotate by r counter-clockwise, add the part's x,y. Pads: shape width x height; smd on the part's side, far side on the other; paste and mask are expansions set on the pad)
6-0805_M [mm] "Chip Resistor, Body 2.0x1.2mm, IPC Low Density"
  rect 1.4x1.5 smd: 1(-1,0) 2(1,0)
  silkscreen extent 0,-0.65 0,0.65, body extent -1.07,-0.7 1.07,0.7, height 0.7
C0805 [mm] "Chip Capacitor, Body 2.0x1.3mm, IPC High Density"
  rect 1.1x1.4 smd: 1(-0.75,0) 2(0.75,0)
  body extent -1.1,-0.72 1.1,0.72, height 1.4
C1206 [mm] "Chip Capacitor, Body 3.2x1.6mm, IPC High Density"
  rect 1.1x1.7 smd: 1(-1.35,0) 2(1.35,0)
  silkscreen extent -0.4,-0.75 0.4,0.75, body extent -1.7,-0.9 1.7,0.9, height 1.3
DW020 [mm] "Plastic Small Outline; 20 Leads; Body Width 7.5 mm"
  rect 0.6x2.15 smd: 1(-5.715,-4.625) 2(-4.445,-4.625) 3(-3.175,-4.625) 4(-1.905,-4.625) 5(-0.635,-4.625) 6(0.635,-4.625) 7(1.905,-4.625) 8(3.175,-4.625) 9(4.445,-4.625) 10(5.715,-4.625) 11(5.715,4.625) 12(4.445,4.625) 13(3.175,4.625) 14(1.905,4.625) 15(0.635,4.625) 16(-0.635,4.625) 17(-1.905,4.625) 18(-3.175,4.625) 19(-4.445,4.625) 20(-5.715,4.625)
  silkscreen extent -6.69,-4.75 6.48,3.15
FX2-120P-1.27SV [mm] "Main Stack Connector"
  rect 4.45x0.8 smd: 1(0,0) 2(0,-1.27) 3(0,-2.54) 4(0,-3.81) 5(0,-5.08) 6(0,-6.35) 7(0,-7.62) 8(0,-8.89) 9(0,-10.16) 10(0,-11.43) 11(0,-12.7) 12(0,-13.97) 13(0,-15.24) 14(0,-16.51) 15(0,-17.78) 16(0,-19.05) 17(0,-20.32) 18(0,-21.59) 19(0,-22.86) 20(0,-24.13) 21(0,-25.4) 22(0,-26.67) 23(0,-27.94) 24(0,-29.21) 25(0,-30.48) 26(0,-31.75) 27(0,-33.02) 28(0,-34.29) 29(0,-35.56) 30(0,-36.83) 31(0,-38.1) 32(0,-39.37) 33(0,-40.64) 34(0,-41.91) 35(0,-43.18) 36(0,-44.45) 37(0,-45.72) 38(0,-46.99) 39(0,-48.26) 40(0,-49.53) 41(0,-50.8) 42(0,-52.07) 43(0,-53.34) 44(0,-54.61) 45(0,-55.88) 46(0,-57.15) 47(0,-58.42) 48(0,-59.69) 49(0,-60.96) 50(0,-62.23) 51(0,-63.5) 52(0,-64.77) 53(0,-66.04) 54(0,-67.31) 55(0,-68.58) 56(0,-69.85) 57(0,-71.12) 58(0,-72.39) 59(0,-73.66) 60(0,-74.93) 61(5.55,-74.93) 62(5.55,-73.66) 63(5.55,-72.39) 64(5.55,-71.12) 65(5.55,-69.85) 66(5.55,-68.58) 67(5.55,-67.31) 68(5.55,-66.04) 69(5.55,-64.77) 70(5.55,-63.5) 71(5.55,-62.23) 72(5.55,-60.96) 73(5.55,-59.69) 74(5.55,-58.42) 75(5.55,-57.15) 76(5.55,-55.88) 77(5.55,-54.61) 78(5.55,-53.34) 79(5.55,-52.07) 80(5.55,-50.8) 81(5.55,-49.53) 82(5.55,-48.26) 83(5.55,-46.99) 84(5.55,-45.72) 85(5.55,-44.45) 86(5.55,-43.18) 87(5.55,-41.91) 88(5.55,-40.64) 89(5.55,-39.37) 90(5.55,-38.1) 91(5.55,-36.83) 92(5.55,-35.56) 93(5.55,-34.29) 94(5.55,-33.02) 95(5.55,-31.75) 96(5.55,-30.48) 97(5.55,-29.21) 98(5.55,-27.94) 99(5.55,-26.67) 100(5.55,-25.4) 101(5.55,-24.13) 102(5.55,-22.86) 103(5.55,-21.59) 104(5.55,-20.32) 105(5.55,-19.05) 106(5.55,-17.78) 107(5.55,-16.51) 108(5.55,-15.24) 109(5.55,-13.97) 110(5.55,-12.7) 111(5.55,-11.43) 112(5.55,-10.16) 113(5.55,-8.89) 114(5.55,-7.62) 115(5.55,-6.35) 116(5.55,-5.08) 117(5.55,-3.81) 118(5.55,-2.54) 119(5.55,-1.27) 120(5.55,0)
  silkscreen extent -1.9,-82.98 4.44,8.05
Harwin_IMU_recp [mm]
  round 1.524 hole 2.2 unplated: 0(-3.5,-1) 0(11.5,-1)
  round 1.3 hole 0.65: 1(0,0) 2(2,0) 3(4,0) 4(6,0) 5(8,0) 6(8,-1.905) 7(6,-1.905) 8(4,-1.905) 9(2,-1.905) 10(0,-1.905)
  silkscreen extent -6,-2.89 14,6
HDR1X3H [mm] "Connector; Header; 3 Position; Right Angle"
  rect 1.5x1.5 hole 0.9: 1(0,0)
  round 1.5 hole 0.9: 2(2.54,0) 3(5.08,0)
  silkscreen extent -1.27,-6.35 6.35,-1.27
Molex_Minifit_JR_5CKT [mm]
  round 0 hole 3 unplated paste+0: 0(0,-7.3) 0(16.8,-7.3)
  round 3 hole 1.8 unplated: 1(0,0) 2(4.2,0) 3(8.4,0) 4(12.6,0) 5(16.8,0)
  silkscreen extent -4.6,-13.84 21.4,-3.05
SB_IND [mm] "Sonar Board Filter Inductor"
  rect 1.5x2.4 smd: 1(0,0) 2(5.5,0)
  silkscreen extent -0.38,-3.18 5.95,3.17
SMA_SMT [mm]
  rect 2.29x5 smd: 1(0,0)
  rect 2.29x5 all layers, no hole: 2(-4.375,0) 2(4.375,0)
  silkscreen extent -5.71,-2.79 5.84,-2.79
SO8_M [mm] "SOIC, 8-Leads, Body 4.9x3.9mm, Pitch 1.27mm, IPC Low Density"
  oval 2.5x0.7 smd: 1(-2.45,1.905) 2(-2.45,0.635) 3(-2.45,-0.635) 4(-2.45,-1.905) 5(2.45,-1.905) 6(2.45,-0.635) 7(2.45,0.635) 8(2.45,1.905)
  silkscreen extent -2.57,-2.5 0.8,2.93, body extent -2,-2.5 2,2.5, height 1.75
SO8_N [mm] "SOIC, 8-Leads, Body 4.9x3.9mm, Pitch 1.27mm, IPC Medium Density"
  oval 2.2x0.6 smd: 1(-2.4,1.905) 2(-2.4,0.635) 3(-2.4,-0.635) 4(-2.4,-1.905) 5(2.4,-1.905) 6(2.4,-0.635) 7(2.4,0.635) 8(2.4,1.905)
  silkscreen extent -2.52,-2.5 0.9,2.88, body extent -2,-2.5 2,2.5, height 1.75
SO-8 [mm] "Small Outline; 8 Leads; Body Width 3.9 mm; Pitch 1.27 mm"
  rect 0.6x2.2 smd: 1(-1.905,-2.6) 2(-0.635,-2.6) 3(0.635,-2.6) 4(1.905,-2.6) 5(1.905,2.6) 6(0.635,2.6) 7(-0.635,2.6) 8(-1.905,2.6)
  silkscreen extent -2.88,-2.72 2.5,1.1
SOD-323 [mm] "SOD-323/SC-76; 2 Leads; Body 1.7 x 1.3 mm, (LxW)"
  rect 1.45x0.55 smd: 1(1.175,0) 2(-1.175,0)
  silkscreen extent -0.95,-0.75 0.95,0.75
SOT223-5N [mm] "SOT223, 5-Leads, Body 6.5x3.5mm, Pitch 1.5mm, Lead Span 7mm, IPC Medium Density"
  rect 2.4x1 smd: 1(-2.9,2.25) 2(-2.9,0.75) 3(-2.9,-0.75) 4(-2.9,-2.25)
  rect 2.4x3.2 smd: 5(2.9,0)
  silkscreen extent -3.02,-3.35 1.4,3.42, body extent -1.85,-3.35 1.85,3.35, height 1.8
TC3216-1206 [mm] "Capacitor, SM Tantalum; Body 3.2 x 1.6 mm (LxW typ)"
  rect 2x1.2 smd: 1(-1.4,0) 2(1.4,0)
  silkscreen extent -1.7,-0.9 1.7,0.9
TC6032-2412 [mm] "Capacitor, SM Tantalum; Body 6.0 x 3.2 mm (LxW typ)"
  rect 2.6x2.2 smd: 1(-2.5,0) 2(2.5,0)
  silkscreen extent -3.92,-1.75 3.15,1.88
TO-220AC [mm] "TO, Thru-Hole, Vertical, Heatsink Mounted; 3 In-Line Leads (1 Absent); Pitch 2.54 mm"
  rect 1.7x1.7 hole 1.1: 1(-2.54,0)
  round 1.7 hole 1.1: 3(2.54,0)
  silkscreen extent -5.3,-1.45 5.3,3.15
TSQFP50P900X900-48N [mm] "Thin QFP, 48-Leads, Body 7x7mm, Pitch 0.5mm, IPC Medium Density"
  oval 1.8x0.3 smd: 1(-4.05,2.75) 2(-4.05,2.25) 3(-4.05,1.75) 4(-4.05,1.25) 5(-4.05,0.75) 6(-4.05,0.25) 7(-4.05,-0.25) 8(-4.05,-0.75) 9(-4.05,-1.25) 10(-4.05,-1.75) 11(-4.05,-2.25) 12(-4.05,-2.75) 25(4.05,-2.75) 26(4.05,-2.25) 27(4.05,-1.75) 28(4.05,-1.25) 29(4.05,-0.75) 30(4.05,-0.25) 31(4.05,0.25) 32(4.05,0.75) 33(4.05,1.25) 34(4.05,1.75) 35(4.05,2.25) 36(4.05,2.75)
  oval 0.3x1.8 smd: 13(-2.75,-4.05) 14(-2.25,-4.05) 15(-1.75,-4.05) 16(-1.25,-4.05) 17(-0.75,-4.05) 18(-0.25,-4.05) 19(0.25,-4.05) 20(0.75,-4.05) 21(1.25,-4.05) 22(1.75,-4.05) 23(2.25,-4.05) 24(2.75,-4.05) 37(2.75,4.05) 38(2.25,4.05) 39(1.75,4.05) 40(1.25,4.05) 41(0.75,4.05) 42(0.25,4.05) 43(-0.25,4.05) 44(-0.75,4.05) 45(-1.25,4.05) 46(-1.75,4.05) 47(-2.25,4.05) 48(-2.75,4.05)
  silkscreen extent -4.17,-2.75 2.75,3.57, body extent -3.5,-3.5 3.5,3.5, height 1.6

## Part data
ADC1_1 ADC1_2: "AD7264 - 14 bit 1MSPS 2 channel ADC"
C1_1 C1_2 C1_3 C1_4 C2_1 C2_2 C2_3 C2_4 C3_1 C3_2 C4_1 C4_2 C5_1 C5_2 C6_1 C6_2 C7_1 C7_2 C8_1 C8_2 C9_1 C9_2 C10_1 C10_2 C11_1 C11_2 C11_3 C11_4 C12_1 C12_2 C12_3 C12_4 C13_1 C13_2 C13_3 C13_4 C14_1 C14_2 C14_3 C14_4 C15_1 C15_2 C15_3 C15_4 C16_1 C16_2 C16_3 C16_4 C17_1 C17_2 C17_3 C17_4 C18 C21 C21 C24 C25 C26 C27 C28 C29 C30 C31: "Capacitor (Semiconductor SIM Model)"
C22 C23 C24: "Polarized Capacitor (Surface Mount)"
D1: library part "Diode 10TQ035", "Schottky Rectifier"
D2 D3 D4 D5 D6 D7 D8 D9: "Zener Diode"
MS_T1 MSB1: "Main Stack Connector, Female"
P1_1 P1_2 P1_3 P1_4: "SMB Straight Connector"
P2: "Header, 5-Pin, Right Angle"
P3: "Header, 10-Pin"
P4 P5 P6 P7: "Header, 3-Pin, Right Angle"
R1_1 R1_2 R1_3 R1_4 R2_1 R2_2 R2_3 R2_4 R3_1 R3_2 R3_3 R3_4 R4_1 R4_2 R4_3 R4_4 R5_1 R5_2 R5_3 R5_4 R6 R6_1 R6_2 R6_3 R6_4 R7 R7_1 R7_2 R7_3 R7_4 R8 R8_1 R8_2 R8_3 R8_4 R12 R13 R14 R15 R16 R17 R18 R19 R20 R21 R22 R23 R24 R25 R26 R27: "Semiconductor Resistor"
U1_1 U1_2 U1_3 U1_4 U3_1 U3_2 U3_3 U3_4: "Precision Rail-to-Rail Input and Ouput Operational Amplifier"
U2_1 U2_2 U2_3 U2_4: "High Speed, Low Voltage Noise, Unity Gain Stable Op-Amp"
U4: "2A Wide Input Range Step-Down Swift Converter"
U4: "Octal Buffer/Driver with 3-State Outputs"
U5: "1.5A Fast Response Ultra Low Dropout Linear Regulator"

## Via types
v1: diameter 0.762, hole 0.381, Top Layer to Bottom Layer, 120 vias
v2: diameter 1, hole 0.45, Top Layer to Bottom Layer, 44 vias
v3: diameter 1, hole 0.45, Top Layer to Ground Plane, 22 vias
v4: diameter 1, hole 0.45, Top Layer to Power Plane, 17 vias
v5: diameter 1.27, hole 0.711, Top Layer to Bottom Layer, 4 vias
v6: diameter 1.9, hole 1.9, Top Layer to Bottom Layer, 4 vias
v7: diameter 3.556, hole 3.556, Top Layer to Bottom Layer, 4 vias

## Nets (pads, with @x,y where several pads share a name; then routed paths per layer and width w, separated by ;. In a path a pad name is that pad's centre, name@x,y a point inside that pad or via, vN(x,y) a via of type N, cw(c..) or ccw(c..) an arc to the next point about the centre after c; other vN are vias at no path point)
3.3V: ADC1_1.24 ADC1_1.27 ADC1_2.24 ADC1_2.27 C9_1.2 C9_2.2 C10_1.2 C10_2.2 C18.2 P2.2 R26.1 U4.20 | length 10.3
  Top Layer w0.254: ADC1_1.27@95.291,47.268 95.291,48.554 C9_1.2@96.545,49.808 96.545,48.755 C10_1.2@97.548,47.752 97.591,47.709 ADC1_1.24@97.591,45.968 100.578,45.968
5V: P2.3 P3.6 P4.3 P5.3 P6.3 P7.3 R22.1
12V: C21.2@34.798,72.124 C22.1 P2.4 R18.1 U4.7@31.914,71.969
24V: P2.5 R14.1